# Altium PCB modFOC.PcbDoc
Units mil, origin at the board's own origin, x right, y up, seen from the top; angles counter-clockwise.
Board outline 6000 x 4000 mil, 2 copper layers (Top Layer, Bottom Layer); 2 components, 9 nets, 81 pads, 0 vias.
Unrouted connection lines stored in the file: 19.
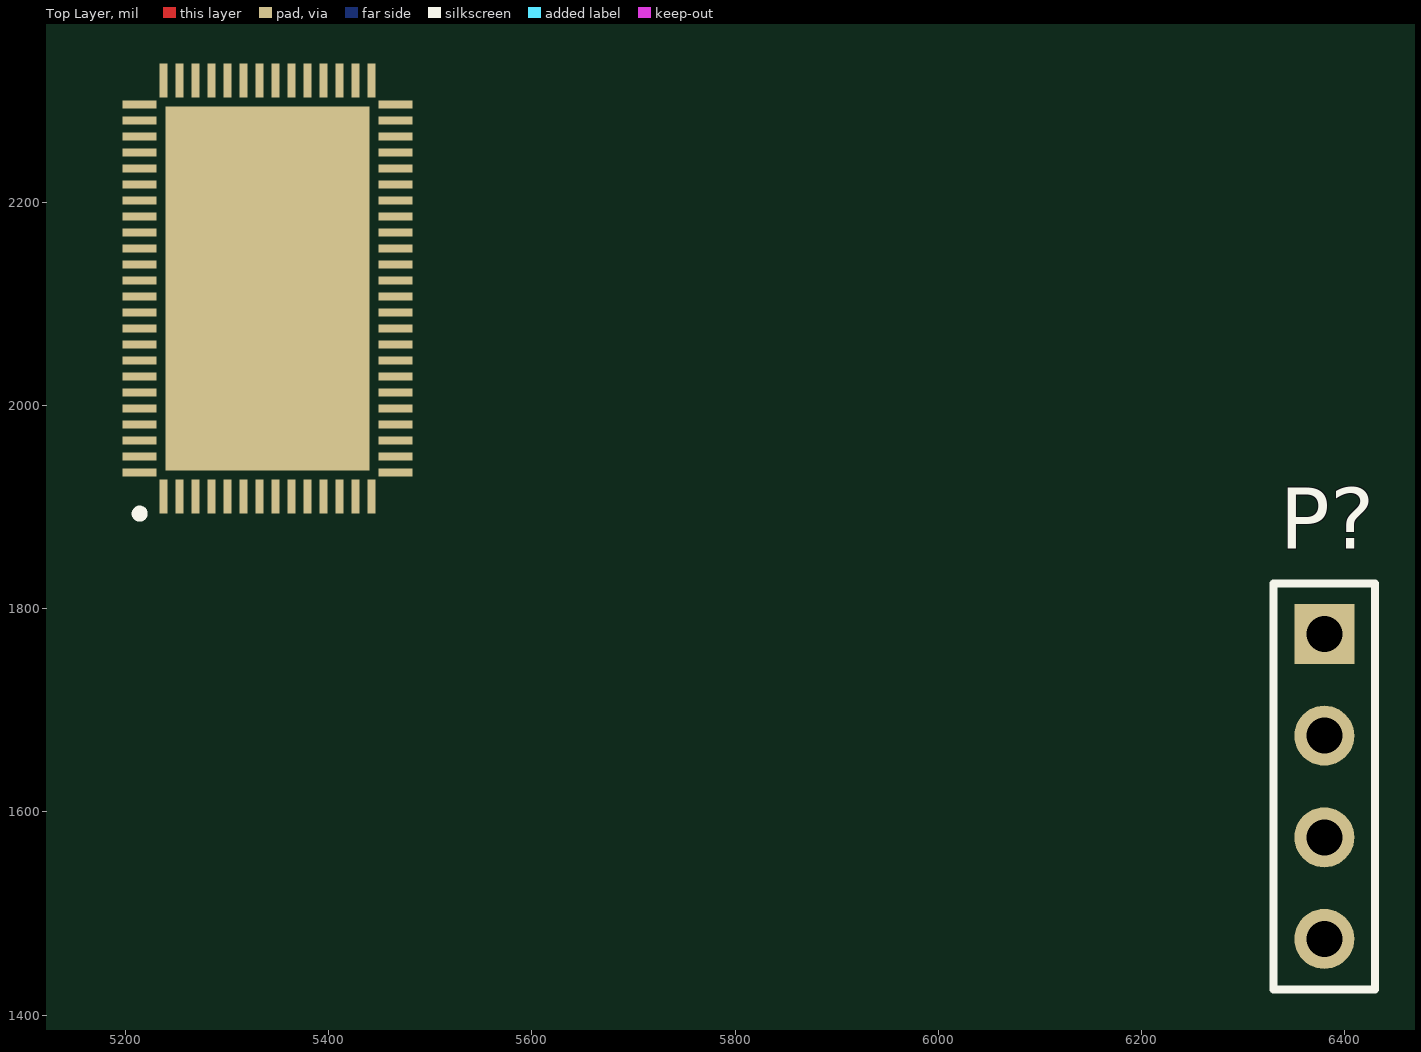
[diagram p0: Top Layer view]
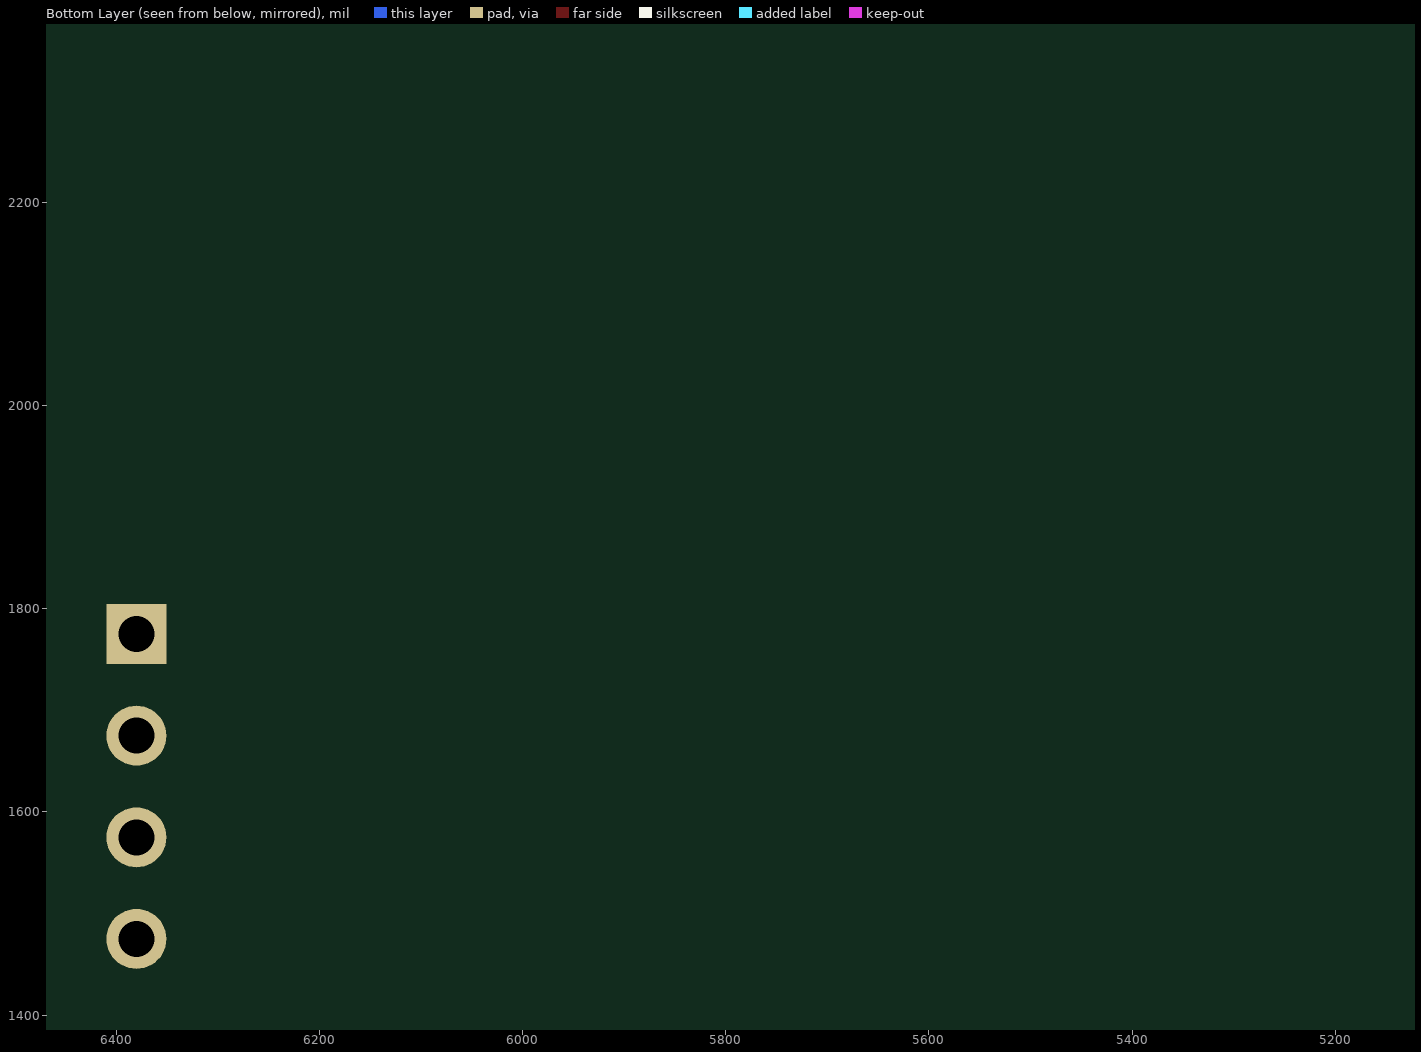
[diagram p1: Bottom Layer view, seen from below]

## Layer stack, top to bottom
Top Solder: solder mask 0.4, Solder Resist, Dk 3.5
Top Layer: signal copper 1.4
Dielectric 1: dielectric 12.6, FR-4, Dk 4.8
Bottom Layer: signal copper 1.4
Bottom Solder: solder mask 0.4, Solder Resist, Dk 3.5

## Board outline
1000,1000 7000,1000 7000,5000 1000,5000

## Design rules (kind name [scope] priority, off if disabled: settings)
Clearance [All] p1: gap=10 ignorepadtopadclearanceinfootprint=FALSE except(0: Arc-Hole Track-Hole SMDPad-Hole THPad-Hole Via-Hole Fill-Hole Poly-Hole Region-Hole Text-Hole)
PolygonConnect [All] p1: connectstyle=Relief reliefconductorwidth=10 reliefentries=4 polygonreliefangle="90 Angle" airgapwidth=10
RoutingVias [All] p1: holewidth=28 width=50 viastyle="Through Hole" minholewidth=28 minwidth=50 maxholewidth=28 maxwidth=50
SolderMaskExpansion [All] p1: expansion=4 istentingtop=FALSE
Width [All] p1: maxlimit=10 minlimit=10 preferedwidth=10
30 further rules are at their usual default settings.

## Components (designator, comment, footprint, x,y, rotation, side; value= is the part's Value field where it differs from the comment)
* "TMC4671-LA IC" QFN40P1050X650X90-77N 5340,2115 r90 top
P? "Header 4" HDR1X4 6380,1775 r270 top

## Footprints (in the part's own frame and the unit in brackets; to place one, negate y for a bottom-side part, rotate by r counter-clockwise, add the part's x,y. Pads: shape width x height; smd on the part's side, far side on the other; paste and mask are expansions set on the pad)
HDR1X4 [mm] "Connector; Header; 4 Position"
  rect 1.5x1.5 hole 0.9: 1(0,0)
  round 1.5 hole 0.9: 2(2.54,0) 3(5.08,0) 4(7.62,0)
  silkscreen extent -1.27,-1.27 8.89,1.27
QFN40P1050X650X90-77N [mm]
  rect 0.85x0.2 smd: 1(-5.2,2.6) 2(-5.2,2.2) 3(-5.2,1.8) 4(-5.2,1.4) 5(-5.2,1) 6(-5.2,0.6) 7(-5.2,0.2) 8(-5.2,-0.2) 9(-5.2,-0.6) 10(-5.2,-1) 11(-5.2,-1.4) 12(-5.2,-1.8) 13(-5.2,-2.2) 14(-5.2,-2.6) 39(5.2,-2.6) 40(5.2,-2.2) 41(5.2,-1.8) 42(5.2,-1.4) 43(5.2,-1) 44(5.2,-0.6) 45(5.2,-0.2) 46(5.2,0.2) 47(5.2,0.6) 48(5.2,1) 49(5.2,1.4) 50(5.2,1.8) 51(5.2,2.2) 52(5.2,2.6)
  rect 0.2x0.85 smd: 15(-4.6,-3.2) 16(-4.2,-3.2) 17(-3.8,-3.2) 18(-3.4,-3.2) 19(-3,-3.2) 20(-2.6,-3.2) 21(-2.2,-3.2) 22(-1.8,-3.2) 23(-1.4,-3.2) 24(-1,-3.2) 25(-0.6,-3.2) 26(-0.2,-3.2) 27(0.2,-3.2) 28(0.6,-3.2) 29(1,-3.2) 30(1.4,-3.2) 31(1.8,-3.2) 32(2.2,-3.2) 33(2.6,-3.2) 34(3,-3.2) 35(3.4,-3.2) 36(3.8,-3.2) 37(4.2,-3.2) 38(4.6,-3.2) 53(4.6,3.2) 54(4.2,3.2) 55(3.8,3.2) 56(3.4,3.2) 57(3,3.2) 58(2.6,3.2) 59(2.2,3.2) 60(1.8,3.2) 61(1.4,3.2) 62(1,3.2) 63(0.6,3.2) 64(0.2,3.2) 65(-0.2,3.2) 66(-0.6,3.2) 67(-1,3.2) 68(-1.4,3.2) 69(-1.8,3.2) 70(-2.2,3.2) 71(-2.6,3.2) 72(-3,3.2) 73(-3.4,3.2) 74(-3.8,3.2) 75(-4.2,3.2) 76(-4.6,3.2)
  rect 9.1x5.1 smd: 77(0,0)
  silkscreen extent -5.72,3.1 -5.53,3.3, body extent -5.3,-3.3 5.3,3.3, height 0.9

## Part data
P?: "Header, 4-Pin", LatestRevisionDate=17-Jul-2002, LatestRevisionNote="Re-released for DXP Platform.", Publisher="Altium Limited"

## Nets (pads, with @x,y where several pads share a name; then routed paths per layer and width w, separated by ;. In a path a pad name is that pad's centre, name@x,y a point inside that pad or via, vN(x,y) a via of type N, cw(c..) or ccw(c..) an arc to the next point about the centre after c; other vN are vias at no path point)
Net*_2: *.2 *.13 *.43 *.52 *.61 *.72
Net*_3: *.3 *.14 *.24 *.44 *.53 *.54 *.62 *.73 *.77
Net*_6: *.6 P?.4
Net*_7: *.7 P?.3
Net*_8: *.8 P?.2
Net*_9: *.9 P?.1
Net*_15: *.15 *.45 *.63
Net*_23: *.23
Net*_51: *.51
pads on no net: *.1 *.4 *.5 *.10 *.11 *.12 *.16 *.17 *.18 *.19 *.20 *.21 *.22 *.25 *.26 *.27 *.28 *.29 *.30 *.31 *.32 *.33 *.34 *.35 *.36 *.37 *.38 *.39 *.40 *.41 *.42 *.46 *.47 *.48 *.49 *.50 *.55 *.56 *.57 *.58 *.59 *.60 *.64 *.65 *.66 *.67 *.68 *.69 *.70 *.71 *.74 *.75 *.76